# Altium PCB pcb.PcbDoc
Units mil, origin at the board's own origin, x right, y up, seen from the top; angles counter-clockwise.
Board outline 4000 x 3000 mil, 2 copper layers (Top Layer, Bottom Layer); 28 components, 22 nets, 114 pads, 0 vias.
Unrouted connection lines stored in the file: 2.
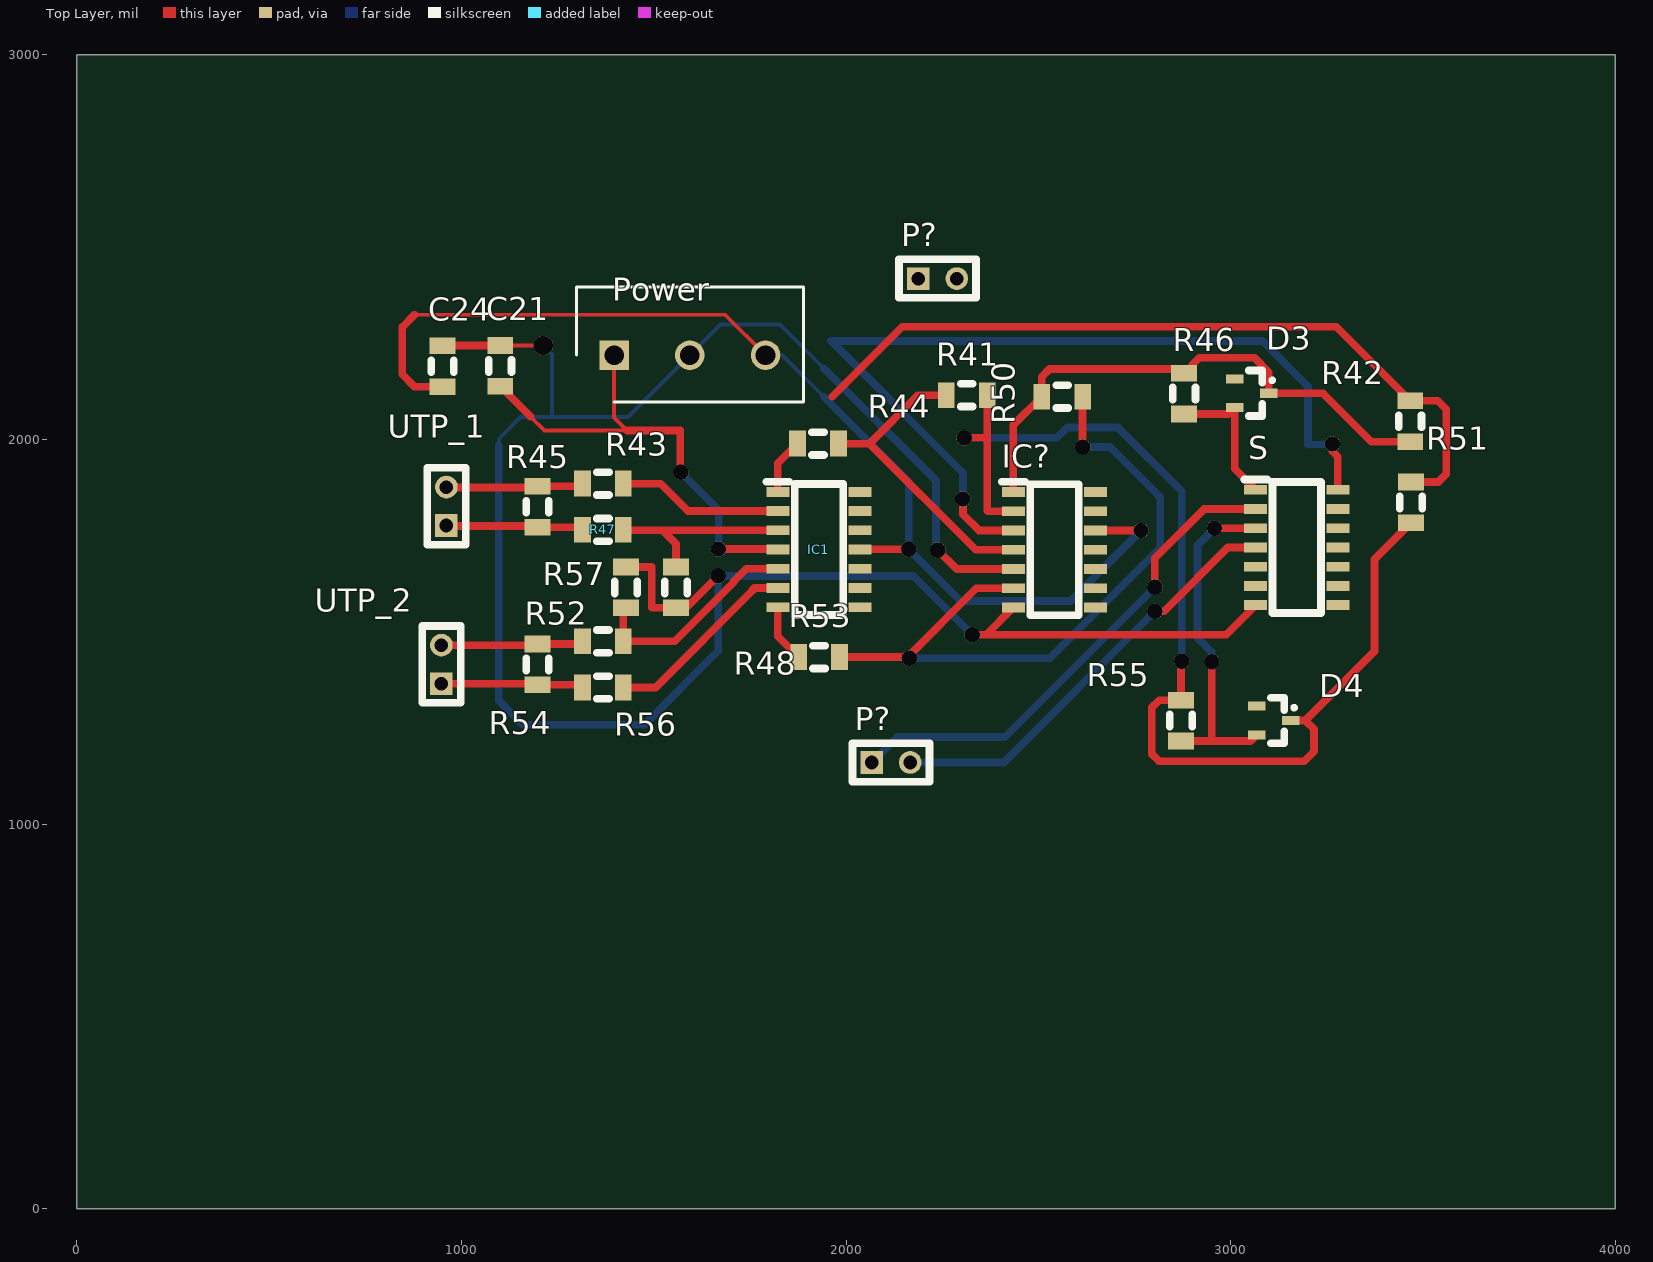
[diagram p0: Top Layer view]
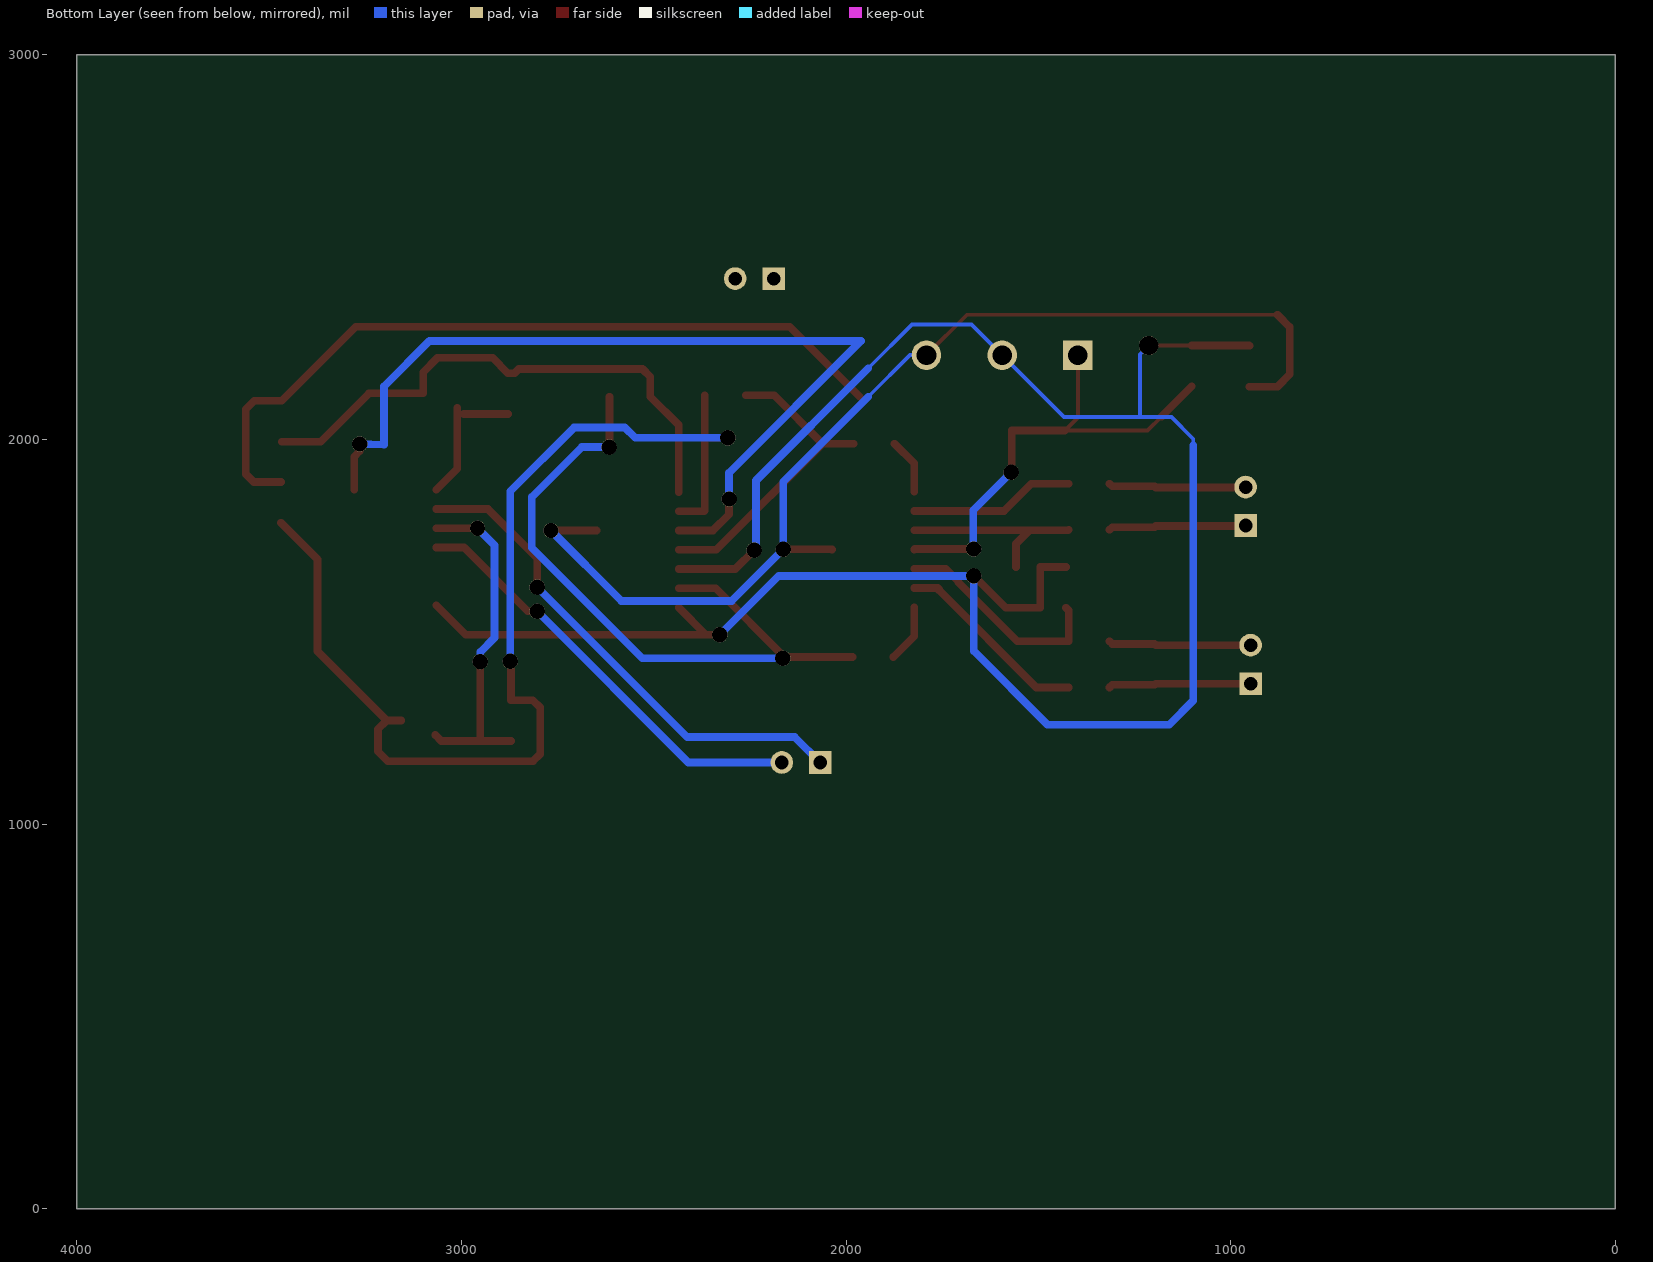
[diagram p1: Bottom Layer view, seen from below]

## Layer stack, top to bottom
Top Solder: solder mask 0.4, Solder Resist, Dk 3.5
Top Layer: signal copper 5
Dielectric 1: dielectric 12.6, FR-4, Dk 4.8
Bottom Layer: signal copper 1.4
Bottom Solder: solder mask 0.4, Solder Resist, Dk 3.5

## Board outline
0,0 4000,0 4000,3000 0,3000

## Design rules (kind name [scope] priority, off if disabled: settings)
Clearance [All] p1: gap=10 ignorepadtopadclearanceinfootprint=FALSE except(0: Arc-Hole Track-Hole SMDPad-Hole THPad-Hole Via-Hole Fill-Hole Poly-Hole Region-Hole Text-Hole)
PolygonConnect [All] p1: connectstyle=Relief reliefconductorwidth=10 reliefentries=4 polygonreliefangle="90 Angle" airgapwidth=10
RoomDefinition scheme [InComponentClass('scheme')] p1: confinementstyle=ConfineIn formatcopy=TRUE lockcomponents=FALSE outline -2110,-2300 -110,-2300 -110,-1300 -2110,-1300
RoutingVias [All] p1: holewidth=28 width=50 viastyle="Through Hole" minholewidth=28 minwidth=50 maxholewidth=28 maxwidth=50
SolderMaskExpansion [All] p1: expansion=4
Width [All] p1: maxlimit=10 minlimit=10 preferedwidth=10
30 further rules are at their usual default settings.

## Components (designator, comment, footprint, x,y, rotation, side; value= is the part's Value field where it differs from the comment)
C21 "Cap Pol3" C1206 1101,2191 r90 top value=100nF
C24 "Cap Pol3" C1206 951,2190 r270 top value=100pF
D3 "Diode 1N4001" SOT23_N 3055,2120 r0 top
D4 "Diode 1N4001" SOT23_N 3112,1269 r0 top
IC1 "LM324AM" SOIC127P600X175-14N 1929.55,1713.63 r0 top
IC? "LM339AM" SOIC127P600X175-14N 2542,1713 r0 top
P? "Header 2" HDR1X2 2067,1160 r0 top
P? "Header 2" HDR1X2 2188,2418 r0 top
Power "DG301-5.0-3P-12" SHDR3W110P0X500_1X3_1500X760X1000P 1397.15,2219 r0 top
R41 "Res3" C1206 2314,2115 r0 top value=1M
R42 "Res3" C1206 3467,2047 r90 top value=1M
R43 "Res3" C1206 1368,1885 r0 top value=1K
R44 "Res3" C1206 1927.15,1989 r0 top value=10K
R45 "Res3" C1206 1198,1825 r90 top value=47K
R46 "Res3" C1206 2879,2119 r90 top value=1M
R47 "Res3" C1206 1368,1765 r0 top value=1K
R48 "Res3" C1206 1558,1615 r90 top value=1M
R50 "Res3" C1206 2562,2111 r180 top value=1M
R51 "Res3" C1206 3469,1836 r90 top value=1M
R52 "Res3" C1206 1368,1475 r0 top value=1K
R53 "Res3" C1206 1930,1434 r0 top value=1K
R54 "Res3" C1206 1198,1415 r90 top value=47K
R55 "Res3" C1206 2871,1269 r90 top value=1M
R56 "Res3" C1206 1368,1355 r0 top value=1K
R57 "Res3" C1206 1428,1615 r270 top value=1M
S "Component_1" SOIC127P600X175-14N 3172,1719 r0 top
UTP_1 "Header 2" HDR1X2 961,1776 r90 top
UTP_2 "Header 2" HDR1X2 948,1365 r90 top

## Footprints (in the part's own frame and the unit in brackets; to place one, negate y for a bottom-side part, rotate by r counter-clockwise, add the part's x,y. Pads: shape width x height; smd on the part's side, far side on the other; paste and mask are expansions set on the pad)
C1206 [mm] "Chip Capacitor, Body 3.2x1.6mm, IPC High Density"
  rect 1.1x1.7 smd: 1(-1.35,0) 2(1.35,0)
  silkscreen extent -0.4,-0.75 0.4,0.75, body extent -1.7,-0.9 1.7,0.9, height 1.3
HDR1X2 [mm] "Connector; Header; 2 Position"
  rect 1.5x1.5 hole 0.9: 1(0,0)
  round 1.5 hole 0.9: 2(2.54,0)
  silkscreen extent -1.27,-1.27 3.81,1.27
SHDR3W110P0X500_1X3_1500X760X1000P [mm]
  rect 1.95x1.95 hole 1.3: 1(0,0)
  round 1.95 hole 1.3: 2(5,0) 3(10,0)
  silkscreen extent -2.5,-3.1 12.5,4.5
SOIC127P600X175-14N [mm]
  rect 1.525x0.65 smd: 1(-2.712,3.81) 2(-2.712,2.54) 3(-2.712,1.27) 4(-2.712,0) 5(-2.712,-1.27) 6(-2.712,-2.54) 7(-2.712,-3.81) 8(2.712,-3.81) 9(2.712,-2.54) 10(2.712,-1.27) 11(2.712,0) 12(2.712,1.27) 13(2.712,2.54) 14(2.712,3.81)
  silkscreen extent -3.47,-4.33 1.6,4.48, body extent -3,-4.33 3,4.33, height 1.75
SOT23_N [mm] "SOT23, 3-Leads, Body 2.9x1.3mm, Pitch 0.95mm, Lead Span 2.3mm - Reverse Pinning, IPC Medium Density"
  rect 1.15x0.6 smd: 1(1.125,0) 2(-1.125,-0.95) 3(-1.125,0.95)
  silkscreen extent -0.2,-1.5 1.48,1.5, body extent -0.7,-1.5 0.7,1.5, height 1.1

## Part data
C21 C24: "Polarized Capacitor (Surface Mount)", LatestRevisionDate=29-May-2009, LatestRevisionNote="IPC-7351 Footprint Added.", PackageDescription="Chip Capacitor", PackageReference=C0805, Published=8-Jun-2000, Publisher="Altium Limited"
D3 D4: "1 Amp General Purpose Rectifier", Code_JEDEC=DO-204-AL, ComponentLink1Description="Manufacturer Link", ComponentLink1URL=http://www.fairchildsemi.com/, ComponentLink2Description=Datasheet, ComponentLink2URL=http://www.fairchildsemi.com/ds/1N%2F1N4001.pdf, DatasheetVersion=1998, LatestRevisionDate=17-Jul-2002, LatestRevisionNote="Re-released for DXP Platform.", PackageDescription="Diode, Axial; Body 5.2 x 2.7 mm (LxDia. max), Lead Dia. 0.86 mm (max)", PackageReference=DO-41, PackageVersion=Aug-1999, Published=8-Jun-2000, Publisher="Altium Limited"
IC1: "Integrated Circuit", Manufacturer_Name="Texas Instruments", Mouser Part Number=926-LM324AM, RS Part Number=4713839, Datasheet Link=http://www.ti.com/lit/ds/symlink/lm324-n.pdf, Height=1.75mm, Manufacturer_Part_Number=LM324AM, Mouser Price/Stock=https://www.mouser.com/Search/Refine.aspx?Keyword=926-LM324AM
IC?: "Integrated Circuit", Manufacturer_Name="Texas Instruments", Mouser Part Number=926-LM339AM, RS Part Number=6364697, Datasheet Link=http://www.ti.com/lit/ds/symlink/lm339-n.pdf, Height=1.75mm, Manufacturer_Part_Number=LM339AM, Mouser Price/Stock=https://www.mouser.com/Search/Refine.aspx?Keyword=926-LM339AM
P? P? UTP_1 UTP_2: "Header, 2-Pin", LatestRevisionDate=17-Jul-2002, LatestRevisionNote="Re-released for DXP Platform.", Publisher="Altium Limited"
Power: "Connector", Manufacturer_Name=Degson, Datasheet Link=https://www.tme.eu/gb/Document/72ad9f371bb0c16572574ac47903b3a1/DG301-5.0.pdf, Height=10mm, Manufacturer_Part_Number=DG301-5.0-3P-12
R41 R42 R43 R44 R45 R46 R47 R48 R50 R51 R52 R53 R54 R55 R56 R57: "Resistor", LatestRevisionDate=29-May-2009, LatestRevisionNote="IPC-7351 Footprint Added.", PackageDescription="Chip Resistor", PackageReference=J1-0603, Published=8-Jun-2000, Publisher="Altium Limited"

## Free pads (board coordinates)
  round 0 on Mech16 paste+0 mask+0: 1(674.13,2296.2)
  round 40 hole 40: 14(2616,1980) 15(2164,1431) 25(3264,1988) 26(2328,1492) 29(2304,1845) 30(2767,1763) 31(2873,1423) 32(2307,2004) 33(2951,1422) 34(2958,1769) 38(2803,1616) 39(2803,1553) Power(1570.68,1914.06) Power(1668,1645) Power(1668,1715) Power(2163,1714) Power(2239,1712)
  round 50 hole 50: 40(1213.15,2244.15)

## Nets (pads, with @x,y where several pads share a name; then routed paths per layer and width w, separated by ;. In a path a pad name is that pad's centre, name@x,y a point inside that pad or via, vN(x,y) a via of type N, cw(c..) or ccw(c..) an arc to the next point about the centre after c; other vN are vias at no path point)
GND: C21.2 C24.1 IC?.5 IC?.7 pad.26 pad.40 pad.Power@1668,1645 pad.Power@2239,1712 Power.2 R48.1 R57.1 S.7 | length 5811.7
  Top Layer w10: C21.2 pad.40
  Top Layer w20: C24.1 952,2244.15 C21.2 ; R57.1 1494.85,1668.15 1494.85,1561.85 R48.1 1584.85,1561.85 pad.Power@1668,1645 ; pad.Power@2239,1712 2288,1663 IC?.5 ; pad.26 2364.23,1492 ; IC?.7 2364.23,1492 ; S.7 2988.23,1492 2364.23,1492
  Bottom Layer w10: 1097,1985 1097,2001 1154,2058 1236,2058 ; pad.40 1236,2221.3 1236,2058 ; 1942.2,2184.8 1828,2299 1674,2299 Power.2 1433,2058 1236,2058
  Bottom Layer w20: 1097,1985 1097,1321 1160,1258 1476,1258 1668,1450 1668,1645 2175,1645 pad.26 ; 1942.2,2184.8 2234,1893 2234,1717 pad.Power@2239,1712
NetD3_1: D3.1 IC?.1 R42.1 R46.2 R50.2 | length 1440.3
  Top Layer w20: IC?.1 2435.23,2037.38 R50.2 2508.85,2162.85 2529,2183 2851,2183 2861.85,2172.15 R46.2 2918.85,2212 3062,2212 3099.29,2174.71 D3.1 3240,2120 3366.15,1993.85 R42.1
NetD3_2: D3.2 R46.1 S.1 | length 351.1
  Top Layer w20: R46.1 2993.96,2065.85 ; D3.2 3010.71,1923.52 S.1
NetD4_1: D4.1 IC?.2 pad.31 pad.32 R41.2 R51.1 R55.2 | length 3020
  Top Layer w20: pad.32 2365.15,2004 2367.15,2002 ; R41.2 2367.15,2002 ; IC?.2 2369.3,1813 2367.15,1815.15 2367.15,2002 ; pad.31 2871,1421 R55.2 2814.15,1322.15 2795,1303 2795,1182 2814,1163 3191,1163 3217,1189 3217,1246 3194,1269 ; D4.1 3194,1269 ; R51.1 3374,1687.85 3374,1449 3194,1269
  Bottom Layer w20: pad.32 2548,2004 2575,2031 2707,2031 2873,1865 pad.31
NetD4_2: D4.2 pad.33 pad.34 R55.1 S.3 | length 899.4
  Top Layer w20: R55.1 2948,1215.85 ; pad.33 2951,1218.85 2948,1215.85 ; pad.34 S.3 ; D4.2 3051.96,1215.85 2948,1215.85
  Bottom Layer w20: pad.33 2951,1447 2914,1484 2914,1725 pad.34 pad.34@2959,1769
NetIC1_1: IC1.1 R44.1 | length 146.6
  Top Layer w20: IC1.1 1822.78,1937.78 R44.1
NetIC1_2: IC1.2 R43.2 | length 431.2
  Top Layer w20: R43.2 1518,1885 1589.37,1813.63 IC1.2
NetIC1_3: IC1.3 R47.2 R48.2 | length 512.2
  Top Layer w20: R47.2 1422.52,1763.63 1523,1763.63 ; R48.2 1558,1728.63 1523,1763.63 ; IC1.3 1523,1763.63
NetIC1_5: IC1.5 R52.2 R57.2 | length 570.8
  Top Layer w20: R57.2 1421.15,1555 R52.2 1554.57,1475 1708,1628.43 1708,1630.71 1740.92,1663.63 IC1.5
NetIC1_6: IC1.6 R56.2 | length 510.1
  Top Layer w20: R56.2 1505.28,1355 1758,1607.72 1758,1610 1761.63,1613.63 IC1.6
NetIC1_7: IC1.7 R53.1 | length 152
  Top Layer w20: IC1.7 1822.78,1488.07 R53.1
NetIC?_4: IC?.4 R41.1 R44.2 | length 821.3
  Top Layer w20: R44.2 2061,1989 ; R41.1 2187,2115 2061,1989 ; IC?.4 2337,1713 2061,1989
NetIC?_6: IC?.6 pad.14 pad.15 R50.1 R53.2 | length 1816.3
  Top Layer w20: R53.2 2160,1434 2339,1613 IC?.6 ; R50.1 2615.15,1980.85 pad.14
  Bottom Layer w20: pad.15 2530,1431 2817,1718 2817,1850 2687,1980 pad.14
NetP?_1: P?.1@2067,1160 pad.38 S.2 | length 1315.1
  Top Layer w20: pad.38 2803,1691 2931,1819 S.2
  Bottom Layer w20: P?.1@2067,1160 2133,1226 2413,1226 pad.38
NetP?_2: P?.2@2167,1160 pad.39 S.4 | length 1129.8
  Top Layer w20: pad.39 2827,1553 2993,1719 S.4
  Bottom Layer w20: P?.2@2167,1160 2410,1160 pad.39
NetR43_1: R43.1 R45.2 UTP_1.2 | length 371
  Top Layer w20: UTP_1.2@948,1875 1194.85,1875 R45.2 1308,1878.15 R43.1
NetR45_1: R45.1 R47.1 UTP_1.1 | length 371
  Top Layer w20: UTP_1.1@948,1775 1194.85,1775 R45.1 1308,1771.85 R47.1
NetR52_1: R52.1 R54.2 UTP_2.2 | length 371
  Top Layer w20: UTP_2.2 1194.85,1465 R54.2 1308,1468.15 R52.1
NetR54_1: R54.1 R56.1 UTP_2.1 | length 371
  Top Layer w20: UTP_2.1 1194.85,1365 R54.1 1308,1361.85 R56.1
"VCC +5V": P?.1@2188,2418 R42.2 R51.2 | length 2029.7
  Top Layer w20: 1964.38,2110.91 2146.47,2293 3274.15,2293 R42.2 3538.85,2100.15 3561,2078 3561,1910 3540.15,1889.15 R51.2
"VCC +15V": C21.1 IC1.4 IC?.3 pad.25 pad.29 pad.Power@1570.68,1914.06 pad.Power@1668,1715 Power.1 S.14 | length 3598.9
  Top Layer w10: 1179.85,2059 1215.85,2023 1430.85,2023 1397.15,2056.7 Power.1
  Top Layer w20: C21.1 1179.85,2059 ; 1430.85,2023 1569.1,2023 1569.1,1915.63 pad.Power@1570.68,1914.06 ; pad.Power@1668,1715 1821.41,1715 IC1.4 ; pad.29 2304,1805 2346,1763 IC?.3 ; pad.25 3264,1970 3278.77,1955.23 S.14
  Bottom Layer w20: pad.Power@1570.68,1914.06 1669.1,1815.63 pad.Power@1669.1,1717.2 ; pad.29 2304,1913 1961,2256 3083,2256 3201,2138 3201,1986 pad.25
"VCC -15": C24.2 IC1.11 IC?.12 pad.30 pad.Power@2163,1714 Power.3 | length 2907.7
  Top Layer w10: 878,2324 1685.85,2324 Power.3
  Top Layer w20: 878,2324 846,2292 846,2169 878.15,2136.85 C24.2 ; IC1.11 2036.69,1714 pad.Power@2163,1714 ; IC?.12 pad.30
  Bottom Layer w10: Power.3 1834,2219 1942.09,2110.91
  Bottom Layer w20: 1942.09,2110.91 2163,1890 2163,1714 2297,1580 2584,1580 pad.30
pads on no net: D3.3 D4.3 IC1.8 IC1.9 IC1.10 IC1.12 IC1.13 IC1.14 IC?.8 IC?.9 IC?.10 IC?.11 IC?.13 IC?.14 P?.2@2288,2418 S.5 S.6 S.8 S.9 S.10 S.11 S.12 S.13